# Altium PCB PCB1.PcbDoc
Units mil, origin at the board's own origin, x right, y up, seen from the top; angles counter-clockwise.
Board outline 6000 x 4000 mil, 2 copper layers (Top Layer, Bottom Layer); 52 components, 32 nets, 148 pads, 0 vias.
Unrouted connection lines stored in the file: 73.
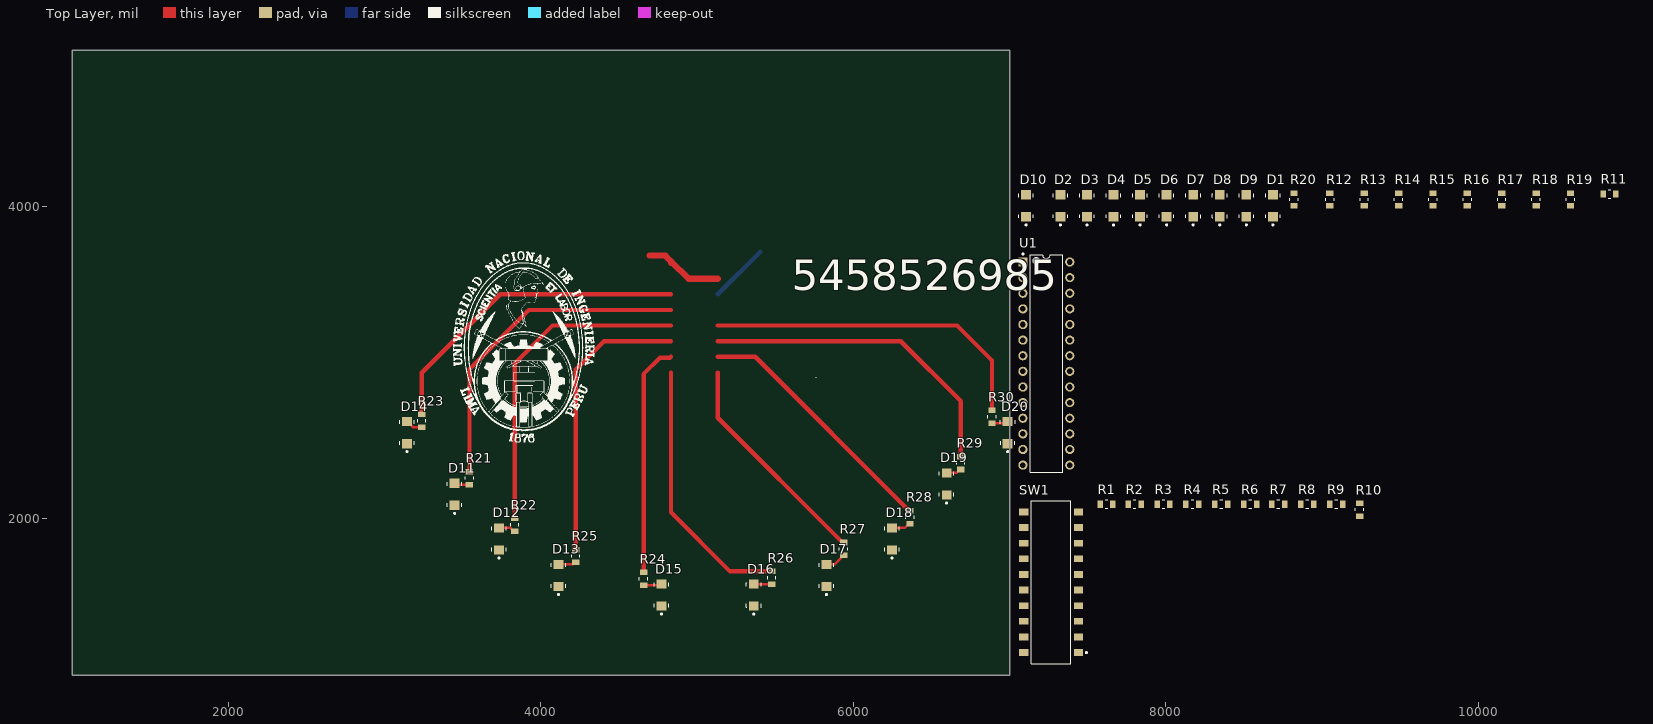
[diagram p0: Top Layer view]
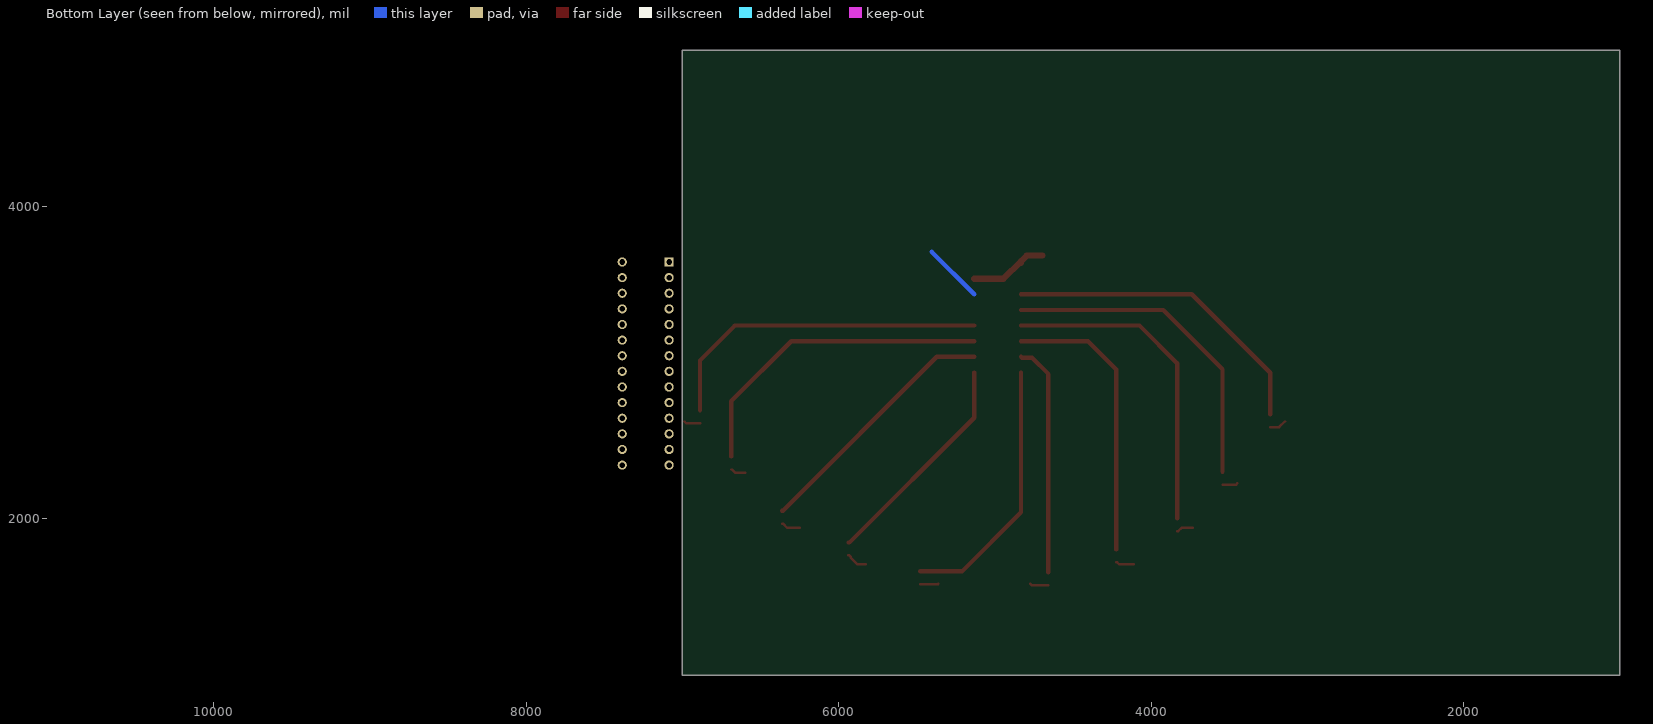
[diagram p1: Bottom Layer view, seen from below]

## Layer stack, top to bottom
Top Solder: solder mask 0.4, Solder Resist, Dk 3.5
Top Layer: signal copper 1.4
Dielectric 1: dielectric 12.6, FR-4, Dk 4.8
Bottom Layer: signal copper 1.4
Bottom Solder: solder mask 0.4, Solder Resist, Dk 3.5

## Board outline
1000,1000 7000,1000 7000,5000 1000,5000

## Design rules (kind name [scope] priority, off if disabled: settings)
Clearance [All] p1: gap=10 ignorepadtopadclearanceinfootprint=FALSE except(0: Arc-Hole Track-Hole SMDPad-Hole THPad-Hole Via-Hole Fill-Hole Poly-Hole Region-Hole Text-Hole)
PolygonConnect [All] p1: connectstyle=Relief reliefconductorwidth=10 reliefentries=4 polygonreliefangle="90 Angle" airgapwidth=10
RoutingVias [All] p1: holewidth=28 width=50 viastyle="Through Hole" minholewidth=28 minwidth=50 maxholewidth=28 maxwidth=50
SolderMaskExpansion [All] p1: expansion=4 istentingtop=FALSE
Width [All] p1: maxlimit=10 minlimit=10 preferedwidth=10
30 further rules are at their usual default settings.

## Classes and differential pairs
component class U_OutputDigital: D1 D2 D3 D4 D5 D6 D7 D8 D9 D10 R11 R12 R13 R14 R15 R16 R17 R18 R19 R20
component class U_Microcontroller: U1
component class U_InputDigital: R1 R2 R3 R4 R5 R6 R7 R8 R9 R10 SW1

## Components (designator, comment, footprint, x,y, rotation, side; value= is the part's Value field where it differs from the comment)
D1 "LTST-C230KRKT" FP-LTST-C230KRKT-MFG 8685,4005 r90 top
D2 "LTST-C230KRKT" FP-LTST-C230KRKT-MFG 7325,4005 r90 top
D3 "LTST-C230KRKT" FP-LTST-C230KRKT-MFG 7495,4005 r90 top
D4 "LTST-C230KRKT" FP-LTST-C230KRKT-MFG 7665,4005 r90 top
D5 "LTST-C230KRKT" FP-LTST-C230KRKT-MFG 7835,4005 r90 top
D6 "LTST-C230KRKT" FP-LTST-C230KRKT-MFG 8005,4005 r90 top
D7 "LTST-C230KRKT" FP-LTST-C230KRKT-MFG 8175,4005 r90 top
D8 "LTST-C230KRKT" FP-LTST-C230KRKT-MFG 8345,4005 r90 top
D9 "LTST-C230KRKT" FP-LTST-C230KRKT-MFG 8515,4005 r90 top
D10 "LTST-C230KRKT" FP-LTST-C230KRKT-MFG 7105,4005 r90 top
D11 "LTST-C230KRKT" FP-LTST-C230KRKT-MFG 3446.94,2158.17 r90 top (schematic designator D2)
D12 "LTST-C230KRKT" FP-LTST-C230KRKT-MFG 3731.94,1872.3 r90 top (schematic designator D3)
D13 "LTST-C230KRKT" FP-LTST-C230KRKT-MFG 4111.94,1638.17 r90 top (schematic designator D4)
D14 "LTST-C230KRKT" FP-LTST-C230KRKT-MFG 3141.94,2553.16 r90 top (schematic designator D1)
D15 "LTST-C230KRKT" FP-LTST-C230KRKT-MFG 4771.94,1513.17 r90 top (schematic designator D5)
D16 "LTST-C230KRKT" FP-LTST-C230KRKT-MFG 5361.94,1513.17 r90 top (schematic designator D6)
D17 "LTST-C230KRKT" FP-LTST-C230KRKT-MFG 5826.94,1638.17 r90 top (schematic designator D7)
D18 "LTST-C230KRKT" FP-LTST-C230KRKT-MFG 6246.94,1872.3 r90 top (schematic designator D8)
D19 "LTST-C230KRKT" FP-LTST-C230KRKT-MFG 6596.94,2224.03 r90 top (schematic designator D9)
D20 "LTST-C230KRKT" FP-LTST-C230KRKT-MFG 6986.94,2553.17 r90 top (schematic designator D10)
R1 "RT0805BRD07249RL" FP-RT0805-MFG 7620,2095 r0 top value=249Ω
R2 "RT0805BRD07249RL" FP-RT0805-MFG 7800,2095 r0 top value=249Ω
R3 "RT0805BRD07249RL" FP-RT0805-MFG 7985,2095 r0 top value=249Ω
R4 "RT0805BRD07249RL" FP-RT0805-MFG 8170,2095 r0 top value=249Ω
R5 "RT0805BRD07249RL" FP-RT0805-MFG 8355,2095 r0 top value=249Ω
R6 "RT0805BRD07249RL" FP-RT0805-MFG 8540,2095 r0 top value=249Ω
R7 "RT0805BRD07249RL" FP-RT0805-MFG 8720,2095 r0 top value=249Ω
R8 "RT0805BRD07249RL" FP-RT0805-MFG 8905,2095 r0 top value=249Ω
R9 "RT0805BRD07249RL" FP-RT0805-MFG 9090,2095 r0 top value=249Ω
R10 "RT0805BRD07249RL" FP-RT0805-MFG 9240,2060 r90 top value=249Ω
R11 "RT0805BRD07249RL" FP-RT0805-MFG 10840,4080 r0 top value=249Ω
R12 "RT0805BRD07249RL" FP-RT0805-MFG 9050,4045 r90 top value=249Ω
R13 "RT0805BRD07249RL" FP-RT0805-MFG 9270,4045 r90 top value=249Ω
R14 "RT0805BRD07249RL" FP-RT0805-MFG 9490,4045 r90 top value=249Ω
R15 "RT0805BRD07249RL" FP-RT0805-MFG 9710,4045 r90 top value=249Ω
R16 "RT0805BRD07249RL" FP-RT0805-MFG 9930,4045 r90 top value=249Ω
R17 "RT0805BRD07249RL" FP-RT0805-MFG 10150,4045 r90 top value=249Ω
R18 "RT0805BRD07249RL" FP-RT0805-MFG 10370,4045 r90 top value=249Ω
R19 "RT0805BRD07249RL" FP-RT0805-MFG 10590,4045 r90 top value=249Ω
R20 "RT0805BRD07249RL" FP-RT0805-MFG 8820,4045 r90 top value=249Ω
R21 "RT0805BRD07249RL" FP-RT0805-MFG 3541.94,2261.83 r90 top value=249Ω (schematic designator R12)
R22 "RT0805BRD07249RL" FP-RT0805-MFG 3831.94,1963.17 r90 top value=249Ω (schematic designator R13)
R23 "RT0805BRD07249RL" FP-RT0805-MFG 3236.94,2629.5 r90 top value=249Ω (schematic designator R11)
R24 "RT0805BRD07249RL" FP-RT0805-MFG 4656.94,1618.17 r90 top value=249Ω (schematic designator R15)
R25 "RT0805BRD07249RL" FP-RT0805-MFG 4221.94,1763.17 r90 top value=249Ω (schematic designator R14)
R26 "RT0805BRD07249RL" FP-RT0805-MFG 5476.94,1623.17 r90 top value=249Ω (schematic designator R16)
R27 "RT0805BRD07249RL" FP-RT0805-MFG 5936.94,1808.17 r90 top value=249Ω (schematic designator R17)
R28 "RT0805BRD07249RL" FP-RT0805-MFG 6361.94,2011.83 r90 top value=249Ω (schematic designator R18)
R29 "RT0805BRD07249RL" FP-RT0805-MFG 6686.94,2358.17 r90 top value=249Ω (schematic designator R19)
R30 "RT0805BRD07249RL" FP-RT0805-MFG 6886.94,2654.5 r90 top value=249Ω (schematic designator R20)
SW1 "A6S-0102-PH" FP-A6S-0102-PH-MFG 7265,1595 r90 top
U1 "ATmega328-PU" 28P3 7235,2995 r0 top

## Footprints (in the part's own frame and the unit in brackets; to place one, negate y for a bottom-side part, rotate by r counter-clockwise, add the part's x,y. Pads: shape width x height; smd on the part's side, far side on the other; paste and mask are expansions set on the pad)
28P3 [mm]
  rect 1.5x1.5 hole 0.9: 1(-3.81,16.51)
  round 1.5 hole 0.9: 2(-3.81,13.97) 3(-3.81,11.43) 4(-3.81,8.89) 5(-3.81,6.35) 6(-3.81,3.81) 7(-3.81,1.27) 8(-3.81,-1.27) 9(-3.81,-3.81) 10(-3.81,-6.35) 11(-3.81,-8.89) 12(-3.81,-11.43) 13(-3.81,-13.97) 14(-3.81,-16.51) 15(3.81,-16.51) 16(3.81,-13.97) 17(3.81,-11.43) 18(3.81,-8.89) 19(3.81,-6.35) 20(3.81,-3.81) 21(3.81,-1.27) 22(3.81,1.27) 23(3.81,3.81) 24(3.81,6.35) 25(3.81,8.89) 26(3.81,11.43) 27(3.81,13.97) 28(3.81,16.51)
  silkscreen extent -3.93,-17.7 2.65,17.93, body extent -3.6,-17.65 3.6,17.65, height 4.58
FP-A6S-0102-PH-MFG [mm]
  rect 1.1x1.5 smd paste+0 mask+0: 1(-11.43,-4.45) 2(-8.89,-4.45) 3(-6.35,-4.45) 4(-3.81,-4.45) 5(-1.27,-4.45) 6(1.27,-4.45) 7(3.81,-4.45) 8(6.35,-4.45) 9(8.89,-4.45) 10(11.43,-4.45) 11(11.43,4.45) 12(8.89,4.45) 13(6.35,4.45) 14(3.81,4.45) 15(1.27,4.45) 16(-1.27,4.45) 17(-3.81,4.45) 18(-6.35,4.45) 19(-8.89,4.45) 20(-11.43,4.45)
  silkscreen extent -13.27,-5.88 13.27,3.2, body extent -13.37,-5.3 13.37,5.3, height 0.25
FP-LTST-C230KRKT-MFG [mm]
  rect 1.5x1.6 smd paste+0 mask+0: 1(-1.8,0) 2(1.8,0)
  silkscreen extent -3.22,-1.19 1.99,1.19, body extent -2.65,-0.95 2.65,0.95, height 0.25
FP-RT0805-MFG [mm]
  rect 0.9x1.2 smd paste+0 mask+0: 1(-1.05,0) 2(1.05,0)
  silkscreen extent -0.23,-0.67 0.23,0.67, body extent -1.6,-0.77 1.6,0.77, height 0.25

## Part data
D1 D2 D3 D4 D5 D6 D7 D8 D9 D10 D11 D12 D13 D14 D15 D16 D17 D18 D19 D20: library part CMP-22017-000041-1, "LED RED CLEAR CHIP SMD", Case Code (Imperial)=1206, Case Code (Metric)=3216, Color=Red, Forward Current=30mA, Forward Voltage=2V, Lens Color=Colorless, Max Operating Temperature=85°C, Min Operating Temperature=-55°C, Package Quantity=1, Power Dissipation=75mW, Reverse Voltage=5V, Test Current=20mA, Case/Package=1206, Depth=1.6mm, Dominant Wavelength=631nm, Height=1.1mm, Illumination Color=Red, Lead Free="Lead Free", Length=3.2mm, Lens Style=Diffused, Lens Transparency=Clear, Luminous Intensity=54mcd, Mount="Surface Mount", Number of Elements=1, Number of LEDs=1, Number of Pins=2, Packaging="Tape and Reel", Power Rating=75mW, Radiation Hardening=No, RoHS Compliant=Yes, Viewing Angle=130°, Wavelength=639nm, Width=1.6mm
R1 R2 R3 R4 R5 R6 R7 R8 R9 R10 R11 R12 R13 R14 R15 R16 R17 R18 R19 R20 R21 R22 R23 R24 R25 R26 R27 R28 R29 R30: library part CMP-03412-035801-1, "RES SMD 249 OHM 0.1% 1/8W 0805", Manufacturer=Yageo, Package=RT0805, Power Rating=0.125W, Resistance=249Ω, Temperature="-55°C to +155°C", Temperature Coefficient="25 ppm/°C", Temperature Range High=+155°C, Temperature Range Low=-55°C, Tolerance=0.0025, Voltage Rating=150V, Automotive=No, Category=Res, ComponentLink2Description=Datasheet, ComponentLink2URL=http://www.yageo.com/documents/recent/PYu-RT_1-to-0.01_RoHS_L_9.pdf, Composition="Thin Film", Device Class L1="Passive Components", Device Class L2=Resistors, Device Class L3="Chip SMD Resistors", Digikey Description="RES SMD 249 OHM 0.1% 1/8W 0805", Footprint Url=http://www.yageo.com/exep/pages/download/literatures/PYu-R_Mount_10.pdf, Height=0.6mm, Ipc Land Pattern Name=RESC200125X50, Lead Free=Yes, Manufacturer Part Number=RT0805BRD07249RL, Mouser Description="Res SMD 249 Ohm .1% 0805", Octopart=https://octopart.com/rt0805brd07249rl-yageo-1410573, RoHS=TRUE, Series=RT
SW1: library part CMP-08827-000074-1, "SWITCH SLIDE DIP SPST 25MA 24V", Case/Package=DIP, Contact Resistance=200mR, Current Rating=25mA, Max Operating Temperature=70°C, Max Voltage Rating (DC)=24V, Min Operating Temperature=-20°C, Package Quantity=900, Actuator Length=0mm, Actuator Type="Slide (Standard)", Contact Plating=Gold, Electrical Life=1000Cycles, Length=1.037inch, Max Current Rating=25mA, Mechanical Life=1000Cycles, Mount="Surface Mount", Number of Positions=10, Orientation=Straight, Packaging="Tape and Reel", Pitch=0.1inch, Radiation Hardening=No, RoHS Compliant=Yes, Series=A6S-H, Terminal Pitch=2.54mm, Termination="Gull Wing", Throw Configuration=SPST, Voltage Rating (DC)=24V, Washable=Yes, Weight=0.87g
U1: library part CMP-0095-00015-2, "8-bit AVR Microcontroller, 32KB Flash, 1KB EEPROM, 2KB SRAM, 28-pin PDIP, Industrial Grade (-40°C to 85°C)", ComponentLink1Description="Manufacturer URL", ComponentLink1URL=http://www.atmel.com/, ComponentLink2Description="ATmega48A/48PA/88A/88PA/168A/168PA/328/328P Datasheet", ComponentLink2URL=http://www.atmel.com/dyn/resources/prod_documents/8271.pdf, ComponentLink3Description="ATmega48A/48PA/88A/88PA/168A/168PA/328/328P Summary", ComponentLink3URL=http://www.atmel.com/dyn/resources/prod_documents/8271S.pdf, DatasheetVersion="revD, May-2011", PackageDescription="28-lead (0.300\"/7.62mm Wide) Plastic Dual Inline Package (PDIP)", PackageReference=28P3, PackageVersion="revB, Sep-2001", RevisionNote="DatasheetVersion updated. URLs added."

## Nets (pads, with @x,y where several pads share a name; then routed paths per layer and width w, separated by ;. In a path a pad name is that pad's centre, name@x,y a point inside that pad or via, vN(x,y) a via of type N, cw(c..) or ccw(c..) an arc to the next point about the centre after c; other vN are vias at no path point)
GND: D1.1 D2.1 D3.1 D4.1 D5.1 D6.1 D7.1 D8.1 D9.1 D10.1 SW1.1 SW1.2 SW1.3 SW1.4 SW1.5 SW1.6 SW1.7 SW1.8 SW1.9 SW1.10 U1.8 U1.22
INT1: R1.1 SW1.20 U1.5
INT2: R2.1 SW1.19 U1.6
INT3: R3.1 SW1.18 U1.11
INT4: R4.1 SW1.17 U1.12
INT5: R5.1 SW1.16 U1.13
INT6: R6.1 SW1.15 U1.14
INT7: R7.1 SW1.14 U1.15
INT8: R8.1 SW1.13 U1.16
INT9: R9.1 SW1.12 U1.17
INT10: R10.1 SW1.11 U1.18
NetD1_2: D1.2 R11.1
NetD2_2: D2.2 R12.1
NetD3_2: D3.2 R13.1
NetD4_2: D4.2 R14.1
NetD5_2: D5.2 R15.1
NetD6_2: D6.2 R16.1
NetD7_2: D7.2 R17.1
NetD8_2: D8.2 R18.1
NetD9_2: D9.2 R19.1
NetD10_2: D10.2 R20.1
Out1: R11.2 U1.23
Out2: R12.2 U1.24
Out3: R13.2 U1.25
Out4: R14.2 U1.26
Out5: R15.2 U1.27
Out6: R16.2 U1.28
Out7: R17.2 U1.1
Out8: R18.2 U1.2
Out9: R19.2 U1.3
Out10: R20.2 U1.4
VCC: R1.2 R2.2 R3.2 R4.2 R5.2 R6.2 R7.2 R8.2 R9.2 R10.2 U1.7 U1.20 U1.21
pads on no net: D11.1 D11.2 D12.1 D12.2 D13.1 D13.2 D14.1 D14.2 D15.1 D15.2 D16.1 D16.2 D17.1 D17.2 D18.1 D18.2 D19.1 D19.2 D20.1 D20.2 R21.1 R21.2 R22.1 R22.2 R23.1 R23.2 R24.1 R24.2 R25.1 R25.2 R26.1 R26.2 R27.1 R27.2 R28.1 R28.2 R29.1 R29.2 R30.1 R30.2 U1.9 U1.10 U1.19
copper on no net: | length 20614.7
  Top Layer w15.75: 3141.94,2624.03 3143.91,2624.03 3179.77,2588.17 3236.94,2588.17 ; 3446.94,2229.03 3455.48,2220.49 3541.94,2220.49 ; 3731.94,1943.17 3804.7,1943.17 3826.03,1921.83 3831.94,1921.83 ; 4111.94,1709.03 4203.24,1709.03 4216.03,1721.83 4221.94,1721.83 ; 4656.94,1576.83 4764.74,1576.83 4771.94,1584.03 ; 5361.94,1584.03 5364.14,1581.83 5476.94,1581.83 ; 5826.94,1709.03 5879.14,1709.03 5921.19,1751.08 5921.19,1756.98 5931.03,1766.83 5936.94,1766.83 ; 6246.94,1943.17 6328.71,1943.17 6356.03,1970.49 6361.94,1970.49 ; 6596.94,2294.9 6659.11,2294.9 6681.03,2316.83 6686.94,2316.83 ; 6886.94,2613.17 6976.07,2613.17 6986.94,2624.03
  Top Layer w27.56: 3236.94,2670.84 3236.94,2935.61 3739.5,3438.17 4831.94,3438.17 ; 3541.94,2303.17 3541.94,2957.93 3922.18,3338.17 4831.94,3338.17 ; 3831.94,2004.5 3831.94,2995.96 4074.14,3238.17 4831.94,3238.17 ; 4221.94,1804.5 4221.94,2956.83 4403.28,3138.17 4831.94,3138.17 ; 4656.94,1659.5 4656.94,2927.26 4761.82,3032.14 4825.91,3032.14 4831.94,3038.17 ; 4831.94,2938.17 4831.94,2042.57 5210.01,1664.5 5476.94,1664.5 ; 5131.94,2938.17 5131.94,2648.6 5931.03,1849.5 5936.94,1849.5 ; 5131.94,3038.17 5371.03,3038.17 6356.03,2053.17 6361.94,2053.17 ; 5131.94,3138.17 6303.28,3138.17 6686.94,2754.5 6686.94,2399.5 ; 5131.94,3238.17 6663.91,3238.17 6886.94,3015.13 6886.94,2695.84
  Top Layer w39.37: 4694.89,3686.52 4796.24,3686.52 4831.94,3650.82 ; 4831.94,3638.17 4831.94,3650.82 ; 5131.94,3538.17 4944.59,3538.17 4831.94,3650.82
  Bottom Layer w27.56: 5131.94,3438.17 5404.46,3710.68

## Silkscreen, mask and mechanical layers (free items; w line width, h text height)
Top Overlay:
  drawing of 58 lines, arcs and shapes, not listed
  text "5458526985" at 5605.25,3464.15 h196.85